# Altium PCB PCB for DCDC.PcbDoc
Units mm, origin at the board's own origin, x right, y up, seen from the top; angles counter-clockwise.
Board outline 36.8 x 14.4 mm, 2 copper layers (Top Layer, Bottom Layer); 14 components, 8 nets, 41 pads, 34 vias.
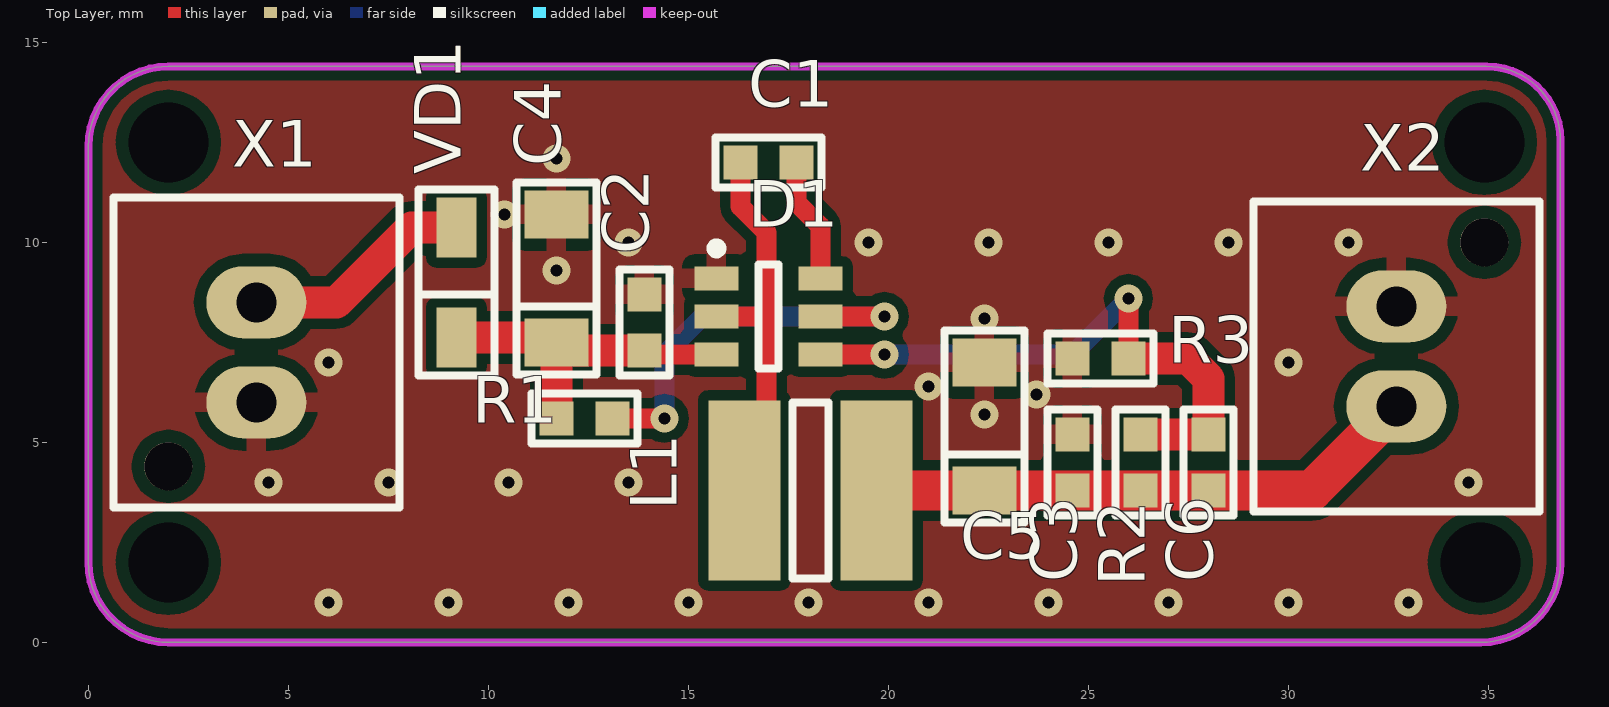
[diagram p0: Top Layer view]
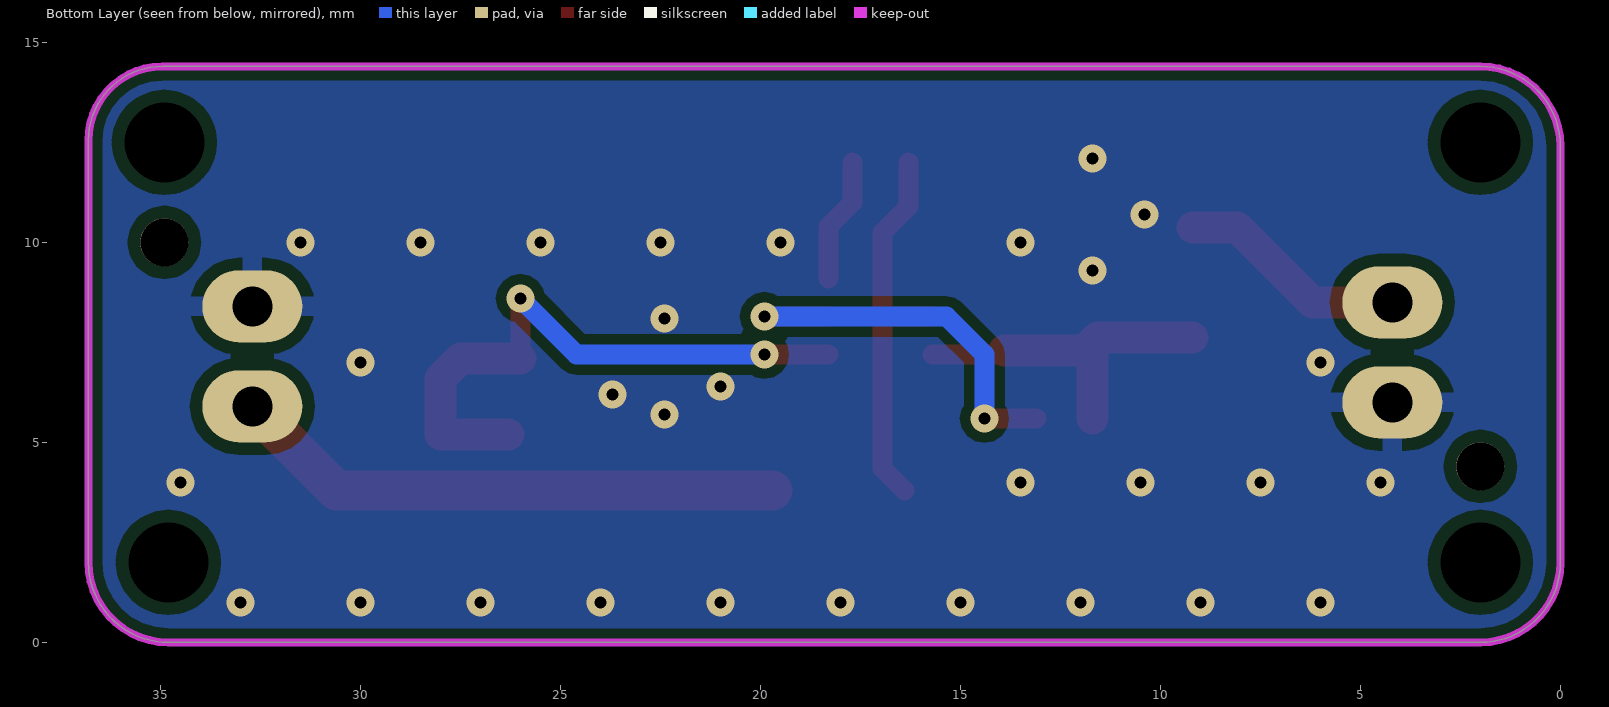
[diagram p1: Bottom Layer view, seen from below]
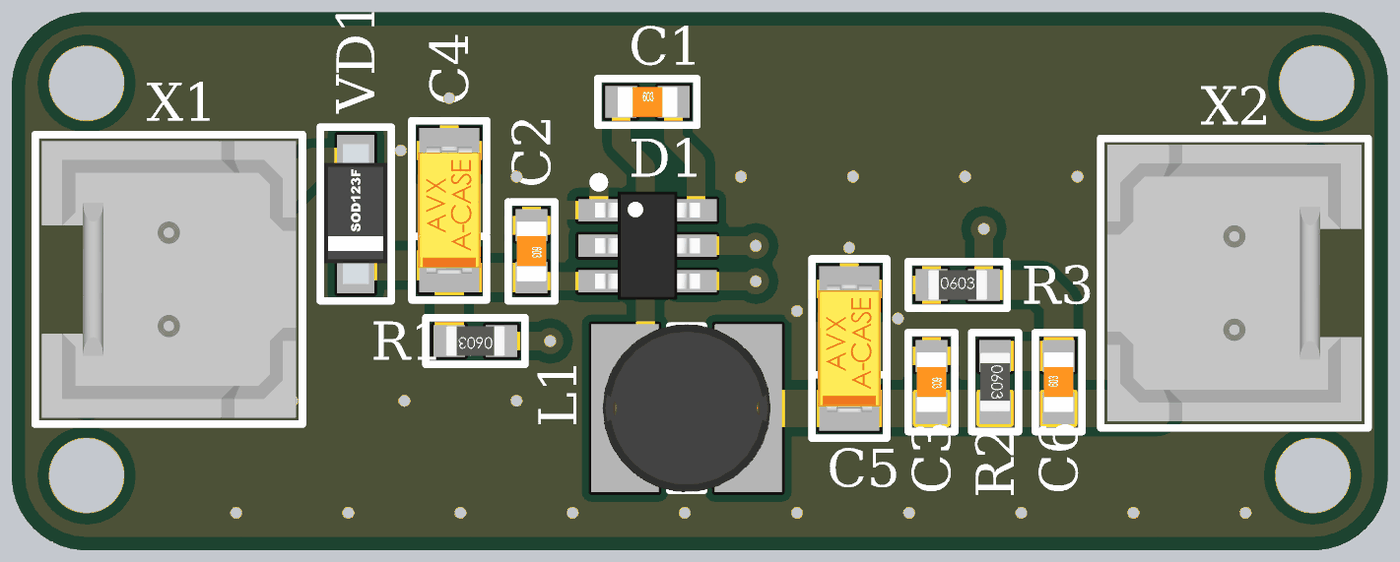
[diagram p2: 3D render of the assembled board from above, using the file's embedded part models]

## Layer stack, top to bottom
Top Solder: solder mask 0.0102, Solder Resist, Dk 3.5
Top Layer: signal copper 0.0356
Dielectric 1: dielectric 0.32, FR-4, Dk 4.8
Bottom Layer: signal copper 0.0356
Bottom Solder: solder mask 0.0102, Solder Resist, Dk 3.5

## Board outline
0,2 0,12.4 cw(c2,12.4) 2,14.4 34.952,14.4 cw(c34.952,12.552) 36.8,12.552 36.8,2 cw(c34.8,2) 34.8,0 2,0 cw(c2,2)

## Design rules (kind name [scope] priority, off if disabled: settings)
BoardOutlineClearance [All] p1: gap=0.3 ignorepadtopadclearanceinfootprint=FALSE
Clearance Clearance_MultiLayerPad [OnLayer('Multi-Layer') and IsPad] p1: gap=0.3 ignorepadtopadclearanceinfootprint=FALSE except(0: Arc-Hole Track-Hole SMDPad-Hole THPad-Hole Via-Hole Fill-Hole Poly-Hole Region-Hole Text-Hole)
Clearance Clearance_Polygon [InPolygon] p2: gap=0.25 ignorepadtopadclearanceinfootprint=FALSE except(0: Arc-Hole Track-Hole SMDPad-Hole THPad-Hole Via-Hole Fill-Hole Poly-Hole Region-Hole Text-Hole)
Clearance [All] p3: gap=0.15 ignorepadtopadclearanceinfootprint=FALSE except(0: Arc-Hole Track-Hole SMDPad-Hole THPad-Hole Via-Hole Fill-Hole Poly-Hole Region-Hole Text-Hole)
ComponentClearance [All] p1: gap=0.5 collisioncheckmode=3 verticalgap=0.5 showdistances=FALSE
DiffPairsRouting [All] p1: maxlimit=0.4 minlimit=0.2 mostfreqgap=0.2 toplayer_minwidth=0.2 toplayer_maxwidth=0.3 toplayer_prefwidth=0.2 bottomlayer_minwidth=0.2 bottomlayer_maxwidth=0.3 bottomlayer_prefwidth=0.2 maxuncoupledlength=12.7
Height [All] p1: minheight=0 maxheight=50 prefheight=12.7
HoleSize [All] p1: absolutevalues=TRUE maxlimit=10 minlimit=0.2 maxpercent=80.000 minpercent=20.000
HoleToHoleClearance [All] p1: gap=0.3 allowstackedmicrovias=TRUE
MinimumSolderMaskSliver [All] p1: minsoldermaskwidth=0.2
PlaneClearance [All] p1: clearance=0.5
PlaneConnect [All] p1: planeconnectstyle=Relief reliefexpansion=0.5 reliefentries=4 reliefconductorwidth=0.5 reliefairgap=0.3
PolygonConnect PolygonConnect_PadGND [InNet('GND') and IsPad] p1: connectstyle=Relief reliefconductorwidth=0.5 reliefentries=4 polygonreliefangle="90 Angle" airgapwidth=0.3
PolygonConnect PolygonConnect_Via [IsVia] p2: connectstyle=Direct reliefconductorwidth=0.254 reliefentries=4 polygonreliefangle="90 Angle" airgapwidth=0.254
PolygonConnect [All] p3: connectstyle=Relief reliefconductorwidth=0.5 reliefentries=4 polygonreliefangle="90 Angle" airgapwidth=0.3
RoutingTopology [All] p1: topology=Vertical
RoutingVias [All] p1: holewidth=0.2 width=0.4 viastyle="Through Hole" minholewidth=0.2 minwidth=0.4 maxholewidth=0.5 maxwidth=1.2
SilkToSolderMaskClearance [IsPad] p1: minsilkscreentomaskgap=0.2 clearancetoexposedcopper=TRUE
SolderMaskExpansion [All] p1: expansion=0.075
Width [All] p1: maxlimit=10 minlimit=0.15 preferedwidth=0.2
20 further rules are at their usual default settings.

## Components (designator, comment, footprint, x,y, rotation, side; value= is the part's Value field where it differs from the comment)
C1 "Ceramic capacitor, 0.1μF, X7R, ±10%, 16V, 0603, -55...+125°C" "CAP: 0603" 17,12 r0 top value=0.1?F
C2 "Ceramic capacitor, 0.1μF, X7R, ±10%, 16V, 0603, -55...+125°C" "CAP: 0603" 13.9,8 r270 top value=0.1?F
C3 "Ceramic capacitor, 1µF, X5R, ±10%, 16V, 0603, -55°C ~ 85°C" "CAP: 0603" 24.6,4.5 r270 top value=1µF
C4 "Tantalum capacitor, 10μF, 20V, ±10%, 2Ohm, case A (3216), -55...+125°C" "CAP: TANTAL-A" 11.7,9.1 r90 top value=10?F
C5 "Tantalum capacitor, 33µF, 	6.3V, ±20%, 2Ohm, case A (3216), -55...+125°C" "CAP: TANTAL-A" 22.4,5.4 r90 top value=33µF
C6 "Ceramic capacitor, 39pF, 	C0G, NP0, ±5%, 	50V, 0603, -55°C ~ 125°C" "CAP: 0603" 28,4.5 r90 top value=39pF
D1 "DC/DC sync buck converter, input 4.5...24V, 500 kHz, output 0.8...16V, 3A, -40...+125°C, TSOT-23-6" SOT23-6 17,8.15 r0 top
L1 "Wirewound, 3.3µH, ±20%, SDR0403, 3A, -40...+125°C" "IND: SDR0403" 19.7,3.8 r270 top value=3.3µH
R1 "Resistor film, 10k, ±1%, 0603, 0.1W, -55°C ~ 155°C" "RES: 0603" 12.4,5.6 r180 top value=10k
R2 "Thick Film, 33k2, ±1%, 0603, 0.1W, 	-55°C ~ 155°C" "RES: 0603" 26.3,4.5 r270 top value=33k2
R3 "Resistor film, 10k, ±1%, 0603, 0.1W, -55°C ~ 155°C" "RES: 0603" 25.3,7.1 r0 top value=10k
VD1 "SS14FL" "DIODE: SOD123F" 9.2,9 r270 top
X1 "Connector, 2pin, 2.50mm, 250V, 3A" "CON: 0533750210" 4.2,8.5 r270 top
X2 "\"Выход 3,3В\"" "CON: 0533750210" 32.7,5.9 r90 top

## Footprints (in the part's own frame and the unit in brackets; to place one, negate y for a bottom-side part, rotate by r counter-clockwise, add the part's x,y. Pads: shape width x height; smd on the part's side, far side on the other; paste and mask are expansions set on the pad)
"CAP: 0603" [mm]
  rect 0.85x0.85 smd: 1(-0.7,0) 2(0.7,0)
  silkscreen extent -1.33,-0.63 1.33,0.63, body extent -0.8,-0.4 0.8,0.4, height 0.3
"CAP: TANTAL-A" [mm]
  rect 1.2x1.6 smd: 1(-1.6,0) 2(1.6,0)
  silkscreen extent -2.4,-1 2.4,1, body extent -1.7,-0.84 1.7,0.84, height 1.71
"CON: 0533750210" [mm] "MOLEX Mini-Lock"
  oval 1.8x2.5 hole 1: 1(0,0) 2(2.5,0)
  round 0.5 on Mech1: ""(-1.9,-2.9)
  round 1.2 hole 1.2: ""(4.1,-2.2)
  silkscreen extent -2.63,-3.57 5.13,3.57, body extent -2.45,-3.4 4.95,3.4, height 11.75
"DIODE: SOD123F" [mm]
  rect 1.5x1 smd: 1(-1.375,0) 2(1.375,0)
  silkscreen extent -2.32,-0.95 2.32,0.95, body extent -1.87,-0.85 1.88,0.85, height 1.23
"IND: SDR0403" [mm]
  rect 4.5x1.8 smd: 1(0,0) 2(0,-3.3)
  silkscreen extent -2.2,-2.1 2.2,-1.2, body extent -2.25,-3.9 2.25,0.6, height 3.5
"RES: 0603" [mm]
  rect 0.85x0.85 smd: 1(-0.7,0) 2(0.7,0)
  silkscreen extent -1.33,-0.63 1.33,0.63, body extent -0.8,-0.4 0.8,0.4, height 0.44
SOT23-6 [mm] "pitch 0.95 mm"
  rect 1.1x0.6 smd: 1(-1.3,0.95) 2(-1.3,0) 3(-1.3,-0.95) 4(1.3,-0.95) 5(1.3,0) 6(1.3,0.95)
  round 0.5 on Mech1: ""(-1,1.1)
  silkscreen extent -1.42,-1.3 0.25,1.82, body extent -1.4,-1.45 1.4,1.45, height 1.45

## Part data
C1 C2: library part Ceramic_0603, Manufacturer="Murata Electronics", Package=0603, PartNumber=GCJ188R71E104KA12D, Temperature=-55...+125°C, Tolerance=±10%, TypeCapacitor="Ceramic capacitor", TypeDielectric=X7R, ValueManufacturerPartNumber="Ceramic capacitor, 0.1?F, X7R, ±10%, 16V, 0603, -55...+125°C", Voltage=16V, HelpURL=https://www.digikey.com/product-detail/en/murata-electronics/GCJ188R71E104KA12D/490-16477-1-ND/7363459
C3: library part Ceramic_0603, Manufacturer="Murata Electronics", Package=0603, PartNumber=GRM188R61C105KA12D, Temperature="-55°C ~ 85°C", Tolerance=±10%, TypeCapacitor="Ceramic capacitor", TypeDielectric=X5R, Voltage=16V, HelpURL=https://www.digikey.com/products/en?keywords=490-10479-1-ND, ValueManufacturerPartNumber="Ceramic capacitor, 1µF, X5R, ±10%, 16V, 0603, -55°C ~ 85°C"
C4: library part Tantal_A, Manufacturer="AVX Corporation", Package="case A (3216)", PartNumber=TCJA106M020R0150, Temperature=-55...+125°C, Tolerance=±10%, TypeCapacitor="Tantalum capacitor", TypeDielectric=X7R, ValueManufacturerPartNumber="Tantalum capacitor, 10?F, 20V, ±10%, 2Ohm, case A (3216), -55...+125°C", Voltage=20V, HelpURL=https://www.digikey.com/product-detail/en/avx-corporation/TCJA106M020R0150/478-9999-1-ND/6156151, Impedance=2Ohm
C5: library part Tantal_A, Manufacturer="Vishay Sprague", Package="case A (3216)", PartNumber=T55A336M6R3C0200, Temperature=-55...+125°C, Tolerance=±20%, TypeCapacitor="Tantalum capacitor", TypeDielectric=X7R, Voltage=6.3V, HelpURL=https://www.digikey.com/products/https://www.digikey.com/products/en?keywords=718-2005-1-NDen?keywords=718-2005-1-ND, Impedance=2Ohm, ValueManufacturerPartNumber="Tantalum capacitor, 33µF, 	6.3V, ±20%, 2Ohm, case A (3216), -55...+125°C"
C6: library part Ceramic_0603, Manufacturer="Murata Electronics", Package=0603, PartNumber=GRM1885C1H390JA01D, Temperature="-55°C ~ 125°C", Tolerance=±5%, TypeCapacitor="Ceramic capacitor", TypeDielectric="C0G, NP0", Voltage=50V, HelpURL=https://www.digikey.com/product-detail/en/murata-electronics/GRM1885C1H390JA01D/490-1417-1-ND/587622, ValueManufacturerPartNumber="Ceramic capacitor, 39pF, 	C0G, NP0, ±5%, 	50V, 0603, -55°C ~ 125°C"
D1: library part TPS56339DDCR, "Sync buck converter", CurrentOutput=3A, Frequency="500 kHz", Manufacturer="Texas Instruments", Package=TSOT-23-6, Temperature=-40...+125°C, VoltageInput="input 4.5...24V", VoltageOutput="output 0.8...16V", ComponentType="DC/DC sync buck converter", HelpURL=https://www.digikey.com/product-detail/en/texas-instruments/TPS56339DDCR/296-53568-1-ND/10273298, PartNumber=TPS56339DDCR, ValueManufacturerPartNumber="DC/DC sync buck converter, input 4.5...24V, 500 kHz, output 0.8...16V, 3A, -40...+125°C, TSOT-23-6"
L1: library part Inductor_SDR0403, Manufacturer=Bourns, MaxCurrent=3A, Package=SDR0403, PartNumber=SDR0403-3R3ML, Temperature=-40...+125°C, Tolerance=±20%, TypeInductor=Wirewound, HelpURL=https://www.digikey.com/product-detail/en/bourns-inc/SDR0403-3R3ML/SDR0403-3R3MLCT-ND/2127093, ValueManufacturerPartNumber="Wirewound, 3.3µH, ±20%, SDR0403, 3A, -40...+125°C"
R1 R3: library part Resistor_0603, Manufacturer=Yageo, Package=0603, PartNumber=RC0603FR-0710KL, Power=0.1W, Temperature="-55°C ~ 155°C", Tolerance=±1%, TypeResistor="Resistor film", HelpURL=https://www.digikey.com/product-detail/en/yageo/RC0603FR-0710KL/311-10.0KHRCT-ND/729827, ValueManufacturerPartNumber="Resistor film, 10k, ±1%, 0603, 0.1W, -55°C ~ 155°C"
R2: library part Resistor_0603, Manufacturer=Yageo, Package=0603, PartNumber=RC0603FR-0733K2L, Power=0.1W, Temperature="-55°C ~ 155°C", Tolerance=±1%, TypeResistor="Thick Film", HelpURL=https://www.digikey.com/product-detail/en/yageo/RC0603FR-0733K2L/311-33.2KHRCT-ND/730108, ValueManufacturerPartNumber="Thick Film, 33k2, ±1%, 0603, 0.1W, 	-55°C ~ 155°C"
VD1: library part Schottky_single, Current=1A, Manufacturer="ON Semiconductor", Package=SOD-123F, Temperature="-55°C ~ 125°C", ValueManufacturerPartNumber="Schottky diode, 40V, 1A, 1V, 15pF, SOD-123F, -55°C ~ 125°C", Voltage=40V, VoltageDrop=1V, HelpURL=https://www.digikey.com/product-detail/en/on-semiconductor/SS14FL/SS14FLTR-ND/5305065, PartNumber=SS14FL, RecoveryTime=15pF, TypeDiode="Schottky diode"
X1: library part CWF-2R, CurrentMax=3A, Manufacturer=Molex, PartNumber=0533750210, VoltageMax=250V, CommentText="\"Вход 3-17В\"", HelpURL=https://www.digikey.com/products/en?keywords=0533750210, Multichannel=2pin, Pitch=2.50mm, TypeConnector=Connector, ValueManufacturerPartNumber="Connector, 2pin, 2.50mm, 250V, 3A"
X2: library part Connector_6PCV-02, CurrentMax=25A, Manufacturer=Molex, PartNumber=0533750210, ValueManufacturerPartNumber="Connector, 2pin, 9.53mm, 300VAC, 25A", VoltageMax=300VAC, CommentText="\"Разъем\"", HelpURL=https://www.digikey.com/products/en?keywords=0533750210, Multichannel=2pin, Pitch=9.53mm, TypeConnector=Connector

## Free pads (board coordinates)
  round 0 hole 2: ""(2,2) ""(2,12.5) ""(34.8,2) ""(34.9,12.5)

## Via types
v1: diameter 0.7, hole 0.3, Top Layer to Bottom Layer, tented both sides, 34 vias

## Nets (pads, with @x,y where several pads share a name; then routed paths per layer and width w, separated by ;. In a path a pad name is that pad's centre, name@x,y a point inside that pad or via, vN(x,y) a via of type N, cw(c..) or ccw(c..) an arc to the next point about the centre after c; other vN are vias at no path point)
GND: C2.1 C3.1 C4.2 C5.2 D1.1 R3.1 X1.2 X2.2
  other v1: 6,1 9,1 12,1 15,1 18,1 21,1 24,1 27,1 30,1 33,1 4.5,4 7.5,4 10.5,4 13.5,4 34.5,4 22.4,5.7 23.7,6.2 21,6.4 6,7 30,7 22.4,8.1 11.7,9.3 13.5,10 19.5,10 22.5,10 25.5,10 28.5,10 31.5,10 10.4,10.7 11.7,12.1
NetC1_1: C1.1 D1.2 L1.2 | length 9.9
  Top Layer w0.5: D1.2 16.95,8.15 ; C1.1 16.3,10.9 16.95,10.25 16.95,8.15 ; L1.2 16.95,4.35 16.95,8.15
NetC1_2: C1.2 D1.6 | length 3.1
  Top Layer w0.5: C1.2 17.7,11 18.3,10.4 D1.6
NetC2_2: C2.2 C4.1 D1.3 R1.2 VD1.2 | length 8.6
  Top Layer w0.5: C2.2 14,7.2 D1.3
  Top Layer w0.8: VD1.2 11.575,7.625 C4.1 ; R1.2 C4.1 ; C2.2 11.9,7.3 C4.1
NetC3_2: C3.2 C5.1 C6.1 L1.1 R2.2 X2.1 | length 13.9
  Top Layer w1: L1.1 C5.1 R2.2 30.6,3.8 X2.1
NetC6_2: C6.2 D1.4 R2.1 R3.2 | length 15.1
  Top Layer w0.5: D1.4 v1(19.9,7.2) ; R3.2 v1(26,8.6)
  Top Layer w0.8: R3.2 27.5,7.1 28,6.6 C6.2 R2.1
  Bottom Layer w0.5: v1(19.9,7.2) 24.6,7.2 v1(26,8.6)
NetD1_5: D1.5 R1.1 | length 10.4
  Top Layer w0.5: R1.1 v1(14.4,5.6) ; D1.5 v1(19.9,8.15)
  Bottom Layer w0.5: v1(14.4,5.6) 14.4,7.2 15.35,8.15 v1(19.9,8.15)
NetVD1_1: VD1.1 X1.1 | length 5.8
  Top Layer w0.8: X1.1 6.2,8.5 8.075,10.375 VD1.1
pads on no net: D1. X1. X2.

## Polygon pours and split planes (outlines as drawn)
GND on Top Layer "Top Layer-GND" (solid, remove dead copper, pour order 0): 0,14.5 37,14.5 37,0 0,0
GND on Bottom Layer "Bottom layer - GND" (solid, remove dead copper, pour order 4): 0,2 0,12.4 cw(c2,12.4) 2,14.4 34.952,14.4 cw(c34.952,12.552) 36.8,12.552 36.8,2 cw(c34.8,2) 34.8,0 2,0 cw(c2,2)

## Keep-outs
Keep-Out Layer:
  lines w0.2: -35,42 65,42 ; 0,2 ccw(c2,2) 2,0 34.8,0 ccw(c34.8,2) 36.8,2 36.8,12.552 ccw(c34.952,12.552) 34.952,14.4 2,14.4 ccw(c2,12.4) 0,12.4 0,2

## Dimensions
-35,42 to 65,42 on Keep-Out Layer